# Altium PCB Side.PcbDoc
Units mm, origin at the board's own origin, x right, y up, seen from the top; angles counter-clockwise.
Board outline 35 x 11 mm, 2 copper layers (Top Layer, Bottom Layer); 7 components, 6 nets, 22 pads, 19 vias.
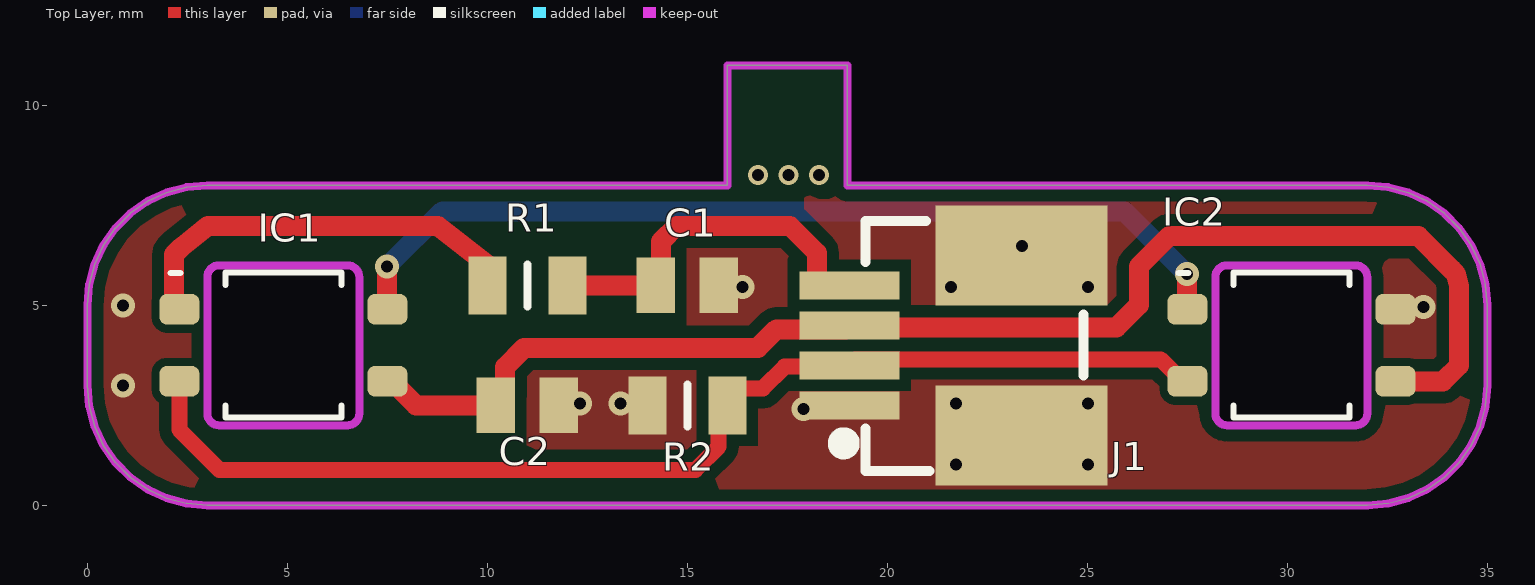
[diagram p0: Top Layer view]
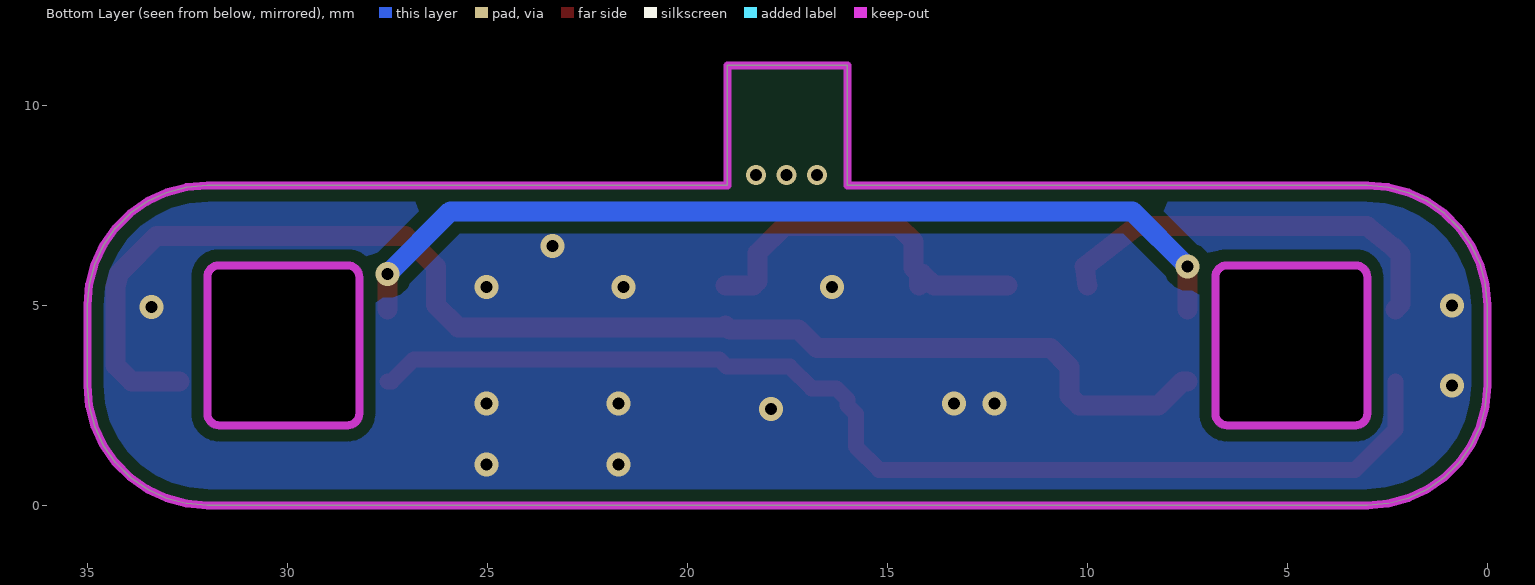
[diagram p1: Bottom Layer view, seen from below]
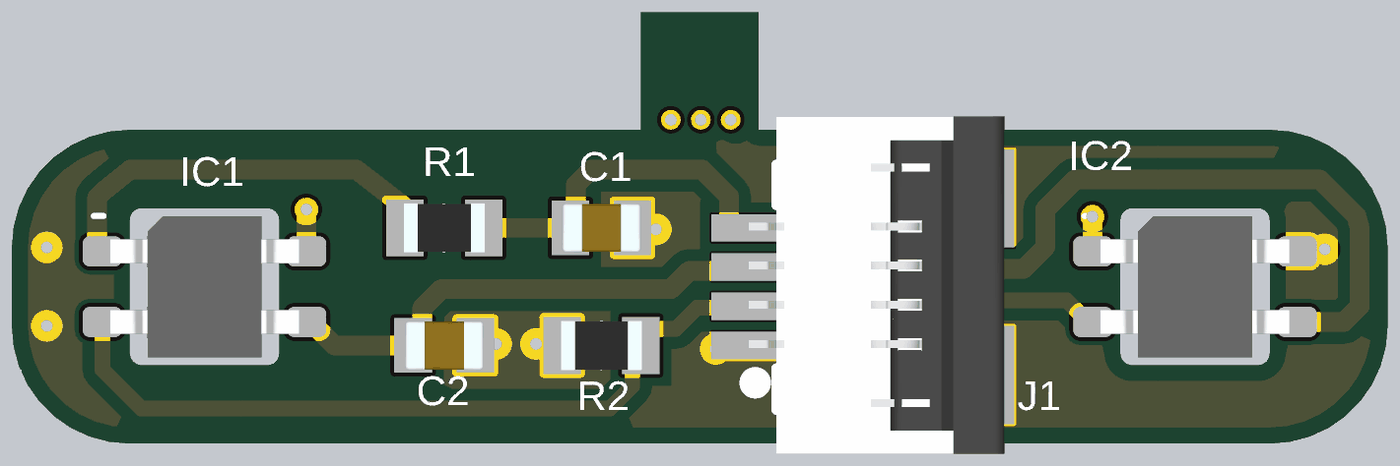
[diagram p2: 3D render of the assembled board from above, using the file's embedded part models]

## Layer stack, top to bottom
Top Solder: solder mask 0.0102, Solder Resist, Dk 3.5
Top Layer: signal copper 0.0356
Dielectric 1: dielectric 0.32, FR-4, Dk 4.8
Bottom Layer: signal copper 0.0356
Bottom Solder: solder mask 0.0102, Solder Resist, Dk 3.5

## Board outline
16,11 16,8 3,8 2.479,7.954 1.974,7.819 1.5,7.598 1.072,7.298 0.702,6.928 0.402,6.5 0.181,6.026 0.046,5.521 0,5 0,3 0.046,2.479 0.181,1.974 0.402,1.5 0.702,1.072 1.072,0.702 1.5,0.402 1.974,0.181 2.479,0.046 3,0 32,0 32.521,0.046 33.026,0.181 33.5,0.402 33.928,0.702 34.298,1.072 34.598,1.5 34.819,1.974 34.954,2.479 35,3 35,5 34.954,5.521 34.819,6.026 34.598,6.5 34.298,6.928 33.928,7.298 33.5,7.598 33.026,7.819 32.521,7.954 32,8 19,8 19,11
cut-out: 3,2.3 3,5.7 3.006,5.759 3.023,5.815 3.051,5.867 3.088,5.912 3.133,5.949 3.185,5.977 3.241,5.994 3.3,6 6.5,6 6.559,5.994 6.615,5.977 6.667,5.949 6.712,5.912 6.749,5.867 6.777,5.815 6.794,5.759 6.8,5.7 6.8,2.3 6.794,2.241 6.777,2.185 6.749,2.133 6.712,2.088 6.667,2.051 6.615,2.023 6.559,2.006 6.5,2 3.3,2 3.241,2.006 3.185,2.023 3.133,2.051 3.088,2.088 3.051,2.133 3.023,2.185 3.006,2.241
cut-out: 28.2,2.3 28.2,5.7 28.206,5.759 28.223,5.815 28.251,5.867 28.288,5.912 28.333,5.949 28.385,5.977 28.441,5.994 28.5,6 31.7,6 31.759,5.994 31.815,5.977 31.867,5.949 31.912,5.912 31.949,5.867 31.977,5.815 31.994,5.759 32,5.7 32,2.3 31.994,2.241 31.977,2.185 31.949,2.133 31.912,2.088 31.867,2.051 31.815,2.023 31.759,2.006 31.7,2 28.5,2 28.441,2.006 28.385,2.023 28.333,2.051 28.288,2.088 28.251,2.133 28.223,2.185 28.206,2.241

## Design rules (kind name [scope] priority, off if disabled: settings)
Clearance Sensors [InComponentClass('Sensors')] p1: gap=0.2 ignorepadtopadclearanceinfootprint=FALSE except(0.01: Arc-SMDPad Track-SMDPad)
Clearance [All] p2: gap=0.3 ignorepadtopadclearanceinfootprint=FALSE
PolygonConnect [All] p1: connectstyle=Direct reliefconductorwidth=0.254 reliefentries=4 polygonreliefangle="90 Angle" airgapwidth=0.254
RoutingVias [All] p1: holewidth=0.711 width=1.27 viastyle="Through Hole" minholewidth=0.711 minwidth=1.27 maxholewidth=0.711 maxwidth=1.27
SolderMaskExpansion [All] p1: expansion=0.102 istentingtop=FALSE
SupplyNets "Schematic Supply Nets_2" [InNet('3V3')] p1: voltage=0.000
SupplyNets "Schematic Supply Nets_1" [InNet('5V')] p2: voltage=0.000
SupplyNets "Schematic Supply Nets" [InNet('GND')] p3: voltage=0.000
Width [All] p1: maxlimit=0.5 minlimit=0.254 preferedwidth=0.4
30 further rules are at their usual default settings.

## Classes and differential pairs
component class Sensors: IC1 IC2

## Components (designator, comment, footprint, x,y, rotation, side; value= is the part's Value field where it differs from the comment)
C1 "CC0805KRX7R9BB104" CAP0805 15,5.5 r0 top value=100nF
C2 "CC0805KRX7R9BB104" CAP0805 11,2.5 r0 top value=100nF
IC1 "QRE1113GR" "SOIC4- SIDE" 4.9,4 r90 top
IC2 "QRE1113GR" "SOIC4- SIDE" 30.1,4 r90 top
J1 "04FMS-1.0SP-TF(LF)(SN)" FPC-SMD-P1.00-4P_JST 25.5,0.5 r90 top
R1 "0805W8F1000T5E" RES0805 11,5.5 r180 top value=100Ω
R2 "0805W8F4701T5E" RES0805 15,2.5 r180 top value=4.7kΩ

## Footprints (in the part's own frame and the unit in brackets; to place one, negate y for a bottom-side part, rotate by r counter-clockwise, add the part's x,y. Pads: shape width x height; smd on the part's side, far side on the other; paste and mask are expansions set on the pad)
CAP0805 [mm]
  rect 0.96x1.39 smd: 1(-0.79,0) 2(0.79,0)
  body extent -1,-0.63 1,0.63, height 0.95
FPC-SMD-P1.00-4P_JST [mm]
  rect 0.7x2.5 smd paste+0 mask+0.051: 1(2,6.45) 2(3,6.45) 3(4,6.45) 4(5,6.45)
  rect 2.5x4.3 smd paste+0 mask+0.051: 5(5.75,2.15) 6(1.25,2.15)
  silkscreen extent 0.36,0.6 6.61,6.79, body extent -0.76,0.25 7.84,6.75, height 2.3
RES0805 [mm]
  rect 0.95x1.45 smd: 1(-1,0) 2(1,0)
  silkscreen extent 0,-0.53 0,0.53, body extent -1.02,-0.63 1.02,0.63, height 0.5
"SOIC4- SIDE" [mm] "Small Outline IC (SOIC), 1.80 mm pitch; 4 pin, 3.40 mm L X 2.70 mm W X 1.70 mm H body"
  rrect49% 0.77x1 smd: 1(0.9,2.6) 2(0.9,-2.6) 3(-0.9,-2.6) 4(-0.9,2.6)
  silkscreen extent -1.8,-1.45 1.83,2.82, body extent -1.8,-2.4 1.8,2.4, height 0.15

## Part data
C1 C2: "Multilayer Ceramic Capacitors MLCC - SMD/SMT 50 V 0.1uF X7R 0805 10%", LCSC=C49678, Manufacturer_Name=YAGEO, Datasheet Link=https://www.yageo.com/upload/media/product/productsearch/datasheet/mlcc/UPY-GPHC_X7R_6.3V-to-50V_20.pdf, Geometry.Height=0.95mm, Manufacturer_Part_Number=CC0805KRX7R9BB104
IC1 IC2: library part QRE1113GR_S, "IC IR-SENSOR", Ic - Collector Current Max=20mA, If - Forward Current Max=50mA, Manufacturer="ON Semiconductor", Operating Temperature="-25°C ~ 85°C", Package / Case="SMD-4 Gull Wing", Pd - Power Dissipation=75mW, Supplier Part Number 1=512-QRE1113GR, Vce - Collector/Emitter Voltage Max=30V, Vf - Forward Voltage=1.4V, Vr - Reverse Voltage=5V, Category=Phototransistor, ComponentLink1Description=Datasheet, ComponentLink1URL=https://br.mouser.com/datasheet/2/308/QRE1113_D-1814544.pdf, ComponentLink2Description="Mouser Link", ComponentLink2URL=https://br.mouser.com/ProductDetail/ON-Semiconductor-Fairchild/QRE1113GR?qs=Qb0BA3xILekkPpSVC5x7uQ%3D%3D, If - Forward Curren t(test)=20mA, Library Control - Checked Footprint=Yes, Library Control - Checked Schematic=Yes, Library Control - Last Project that Used=Follow-Final, Library Control - Last Update="24/04/2021 00:25", Library Control - Person that Checked Footprint=Lucas, Library Control - Person that Checked Schematic=Lucas, Library Control - Person that did the Last Update Footprint=Mateus(Dimas), Library Control - Person that did the Last Update Schematic=Mateus(Dimas), Library Ref=Phototransistor, Part Number=QRE1113GR, Price="1=1,150, 10=0,955, 100=0,542 (USD)", Rise Time=20us, Sensing Distance (máx)=5mm, Supplier 1=Mouser, Wavelength=940nm
J1: "Drawer Type 4P Dual-sided contacts / top and bottom connection Horizontal attachment 1mm SMD,P=1mm,Surface Mount，Right Angle FFC, FPC (Flat Flexible) Connector Assemblies ROHS", LCSC=C265033, Manufacturer_Name=JST, ComponentLink1Description=JLCPCB, ComponentLink1URL=https://jlcpcb.com/partdetail/Jst-04FMS_1_0SP_TF_LF_SN/C265033, ComponentLink2Description=Datasheet, ComponentLink2URL=https://www.lcsc.com/datasheet/lcsc_datasheet_1811061308_JST-04FMS-1-0SP-TF-LF-SN_C265033.pdf, Geometry.Height=2.80mm, Manufacturer_Part_Number=04FMS-1.0SP-TF(LF)(SN)
R1: "125mW Thick Film Resistors 150V ±100ppm/℃ ±1% 100Ω 0805 Chip Resistor - Surface Mount ROHS", LCSC=C17408, Manufacturer_Name=UNI-ROYAL, Datasheet Link=https://wmsc.lcsc.com/wmsc/upload/file/pdf/v2/lcsc/2206010216_UNI-ROYAL-Uniroyal-Elec-0805W8F1000T5E_C17408.pdf, Geometry.Height=0.95mm, Manufacturer_Part_Number=0805W8F1000T5E
R2: "125mW Thick Film Resistors 150V ±100ppm/℃ ±1% 4.7kΩ 0805 Chip Resistor - Surface Mount ROHS", LCSC=C17673, Manufacturer_Name=UNI-ROYAL, Datasheet Link=https://wmsc.lcsc.com/wmsc/upload/file/pdf/v2/lcsc/2206010200_UNI-ROYAL-Uniroyal-Elec-0805W8F4701T5E_C17673.pdf, Geometry.Height=0.95mm, Manufacturer_Part_Number=0805W8F4701T5E

## Via types
v1: diameter 0.6, hole 0.3, Top Layer to Bottom Layer, 16 vias
v2: diameter 0.5, hole 0.3, Top Layer to Bottom Layer, 3 vias

## Nets (pads, with @x,y where several pads share a name; then routed paths per layer and width w, separated by ;. In a path a pad name is that pad's centre, name@x,y a point inside that pad or via, vN(x,y) a via of type N, cw(c..) or ccw(c..) an arc to the next point about the centre after c; other vN are vias at no path point)
3V3: C2.1 IC1.3 IC2.3 J1.3 | length 34.2
  Top Layer w0.5: IC1.3 7.615,3.1 8.215,2.5 C2.1 10.44,2.73 10.44,3.455 10.922,3.937 16.764,3.937 17.227,4.4 17.757,4.4 18.95,4.4 J1.3 19.1,4.45 25.728,4.45 26.289,5.011 26.289,5.969 27.051,6.731 33.274,6.731 34.113,5.892 34.207,5.798 34.29,5.489 34.29,3.496 33.894,3.1 IC2.3
5V: C1.1 J1.4 R1.1 | length 9.3
  Top Layer w0.5: R1.1 13.837,5.5 C1.1@14.131,5.794 ; C1.1 14.21,5.794 14.346,5.93 14.346,6.599 14.732,6.985 17.565,6.985 18.243,6.307 18.243,5.6 18.343,5.5 J1.4
GND: C1.2 C2.2 IC2.2 J1.1 J1.5 J1.6 R2.2
  other v1: 21.717,1.016 25.019,1.016 17.907,2.413 12.319,2.54 13.335,2.54 21.717,2.54 25.019,2.54 0.889,3 33.401,4.953 0.889,5 16.383,5.461 21.59,5.461 25.019,5.461 23.368,6.477
IR: IC1.4 IC2.4 J1.2 R2.1 | length 28.8
  Top Layer w0.4: IC1.4 2.3,1.891 3.302,0.889 15.205,0.889 15.784,1.468 15.784,2.284 R2.1 16,2.646 16.275,2.921 16.891,2.921 17.436,3.466 19.016,3.466 19.2,3.65 20.334,3.65 26.835,3.65 27.385,3.1 IC2.4
NetIC1_1: IC1.1 R1.2 | length 10.4
  Top Layer w0.5: IC1.1 2.171,5.035 2.171,6.275 2.337,6.44 3.014,6.985 8.763,6.985 10.064,5.975 R1.2
NetIC1_2: IC1.2 IC2.1 | length 23.2
  Top Layer w0.5: v1(7.493,5.969) 7.497,5.965 7.497,4.904 IC1.2 ; v1(27.489,5.785) 27.495,5.779 27.495,4.905 IC2.1
  Bottom Layer w0.5: v1(7.493,5.969) 8.874,7.35 25.924,7.35 v1(27.489,5.785)
copper on no net:
  other v2: 16.764,8.255 17.526,8.255 18.288,8.255

## Polygon pours and split planes (outlines as drawn)
GND on Top Layer "GND_L01_P000" (solid, remove dead copper, pour order 0): 0,0 35.179,0 35.179,7.874 35.052,8.001 -0.127,8.001
GND on Bottom Layer "GND_L02_P001" (solid, pour order 1): 0,0 35.179,0 35.179,7.874 35.052,8.001 -0.127,8.001

## Keep-outs
Keep-Out Layer:
  lines w0.2: 0,3 0.046,2.479 0.181,1.974 0.402,1.5 0.702,1.072 1.072,0.702 1.5,0.402 1.974,0.181 2.479,0.046 3,0 32,0 32.521,0.046 33.026,0.181 33.5,0.402 33.928,0.702 34.298,1.072 34.598,1.5 34.819,1.974 34.954,2.479 35,3 35,5 34.954,5.521 34.819,6.026 34.598,6.5 34.298,6.928 33.928,7.298 33.5,7.598 33.026,7.819 32.521,7.954 32,8 19,8 19,11 16,11 16,8 3,8 2.479,7.954 1.974,7.819 1.5,7.598 1.072,7.298 0.702,6.928 0.402,6.5 0.181,6.026 0.046,5.521 0,5 0,3 ; 3,2.3 3.006,2.241 3.023,2.185 3.051,2.133 3.088,2.088 3.133,2.051 3.185,2.023 3.241,2.006 3.3,2 6.5,2 6.559,2.006 6.615,2.023 6.667,2.051 6.712,2.088 6.749,2.133 6.777,2.185 6.794,2.241 6.8,2.3 6.8,5.7 6.794,5.759 6.777,5.815 6.749,5.867 6.712,5.912 6.667,5.949 6.615,5.977 6.559,5.994 6.5,6 3.3,6 3.241,5.994 3.185,5.977 3.133,5.949 3.088,5.912 3.051,5.867 3.023,5.815 3.006,5.759 3,5.7 3,2.3 ; 28.2,2.3 28.206,2.241 28.223,2.185 28.251,2.133 28.288,2.088 28.333,2.051 28.385,2.023 28.441,2.006 28.5,2 31.7,2 31.759,2.006 31.815,2.023 31.867,2.051 31.912,2.088 31.949,2.133 31.977,2.185 31.994,2.241 32,2.3 32,5.7 31.994,5.759 31.977,5.815 31.949,5.867 31.912,5.912 31.867,5.949 31.815,5.977 31.759,5.994 31.7,6 28.5,6 28.441,5.994 28.385,5.977 28.333,5.949 28.288,5.912 28.251,5.867 28.223,5.815 28.206,5.759 28.2,5.7 28.2,2.3